# EAGLE board ControlBoard (EAGLE 9.6.2)

Size 126 x 59 mm. Coordinates in mm from the lower left corner, seen from the top.
Outline: 0,0 126,0 126,30 86,30 86,51 43,51 43,59 17,59 17,30 0,30 0,0
Copper layers (1*16): Top 0.035mm / dielectric 1.5mm / Bottom 0.035mm
Design rules "default": minimum track width 6mil, minimum drill 0.35mm, track to track 6mil, track to pad 6mil, pad to pad 6mil, via to via 6mil, smd to smd 6mil, copper to edge 40mil, drill to drill 6mil, minimum pad ring 10mil, minimum via ring 8mil, stop-mask expansion 4mil, vias tented up to drill 0mil, thermal gap 10mil

## Footprints (pad centres in the part's own frame; a part is rotated, then mirrored left to right if it is on the bottom)
B375P = drill 0.7 pad 2.159 octagon: 1 -2.54,0; 2 0,2.54; 3 2.54,0
9MM_METAL_SHAFT = drill 1.1 pad 1.93 square: P$1 2.54,0 | drill 1.1 pad 1.93: P$2 0,0; P$3 -2.54,0 | drill 1.5: P$4 -5,7; P$5 5,7
.33UF+ = drill 1 pad 2: 1 -2.54,0; 2 2.54,0
5MM = drill 1 pad 2: 1 -2.54,0; 2 2.54,0
B3B-XH = drill 1 pad 1.676 square: P$1 2.5,0 | drill 1 pad 1.676: P$2 0,0; P$3 -2.5,0
SE14 = drill 1.397 pad 2.54 octagon: MP 0,0
82114R = drill 0.813 long: 1 0,1.905; 2 0,-1.905
2X13 = drill 1.016 pad 1.88 square: 1 0,0 | drill 1.016 pad 1.88: 2 0,2.54; 3 2.54,0; 4 2.54,2.54; 5 5.08,0; 6 5.08,2.54; 7 7.62,0; 8 7.62,2.54; 9 10.16,0; 10 10.16,2.54; 11 12.7,0; 12 12.7,2.54; 13 15.24,0; 14 15.24,2.54; 15 17.78,0; 16 17.78,2.54; 17 20.32,0; 18 20.32,2.54; 19 22.86,0; 20 22.86,2.54; 21 25.4,0; 22 25.4,2.54; 23 27.94,0; 24 27.94,2.54; 25 30.48,0; 26 30.48,2.54
DIL08 = drill 1.1 pad 1.8 square: 1 -3.81,-3.81 | drill 1.1 pad 1.8: 2 -1.27,-3.81; 3 1.27,-3.81; 4 3.81,-3.81; 5 3.81,3.81; 6 1.27,3.81; 7 -1.27,3.81; 8 -3.81,3.81
7.5MM.2 = drill 1 pad 2: 1 -3.81,0; 2 3.81,0

## Placement (x,y rotation side)
BASS  10K  [B375P]  -62.23,35.29 0 top  (outside the outline)
BRIGHTNESS  50K  [9MM_METAL_SHAFT]  96,5 0 top
C1  10nF  [.33UF+]  -63.5,60.69 0 top  (outside the outline)
C2  100nF  [5MM]  -52.07,65.77 0 top  (outside the outline)
C3  18nF  [.33UF+]  -17.78,67.04 0 top  (outside the outline)
C4  220nF  [.33UF+]  -26.67,67.04 0 top  (outside the outline)
C5  100nF  [5MM]  -59.69,65.77 0 top  (outside the outline)
C6  *pF  [.33UF+]  -35.56,67.04 0 top  (outside the outline)
C7  *pF  [.33UF+]  -44.45,67.04 0 top  (outside the outline)
FEEDBACK  10K  [9MM_METAL_SHAFT]  30,5 0 top
GAIN  100K  [9MM_METAL_SHAFT]  74,5 0 top
HEAD_LONG  03-JST-B3B-XH-A  [B3B-XH]  -58.42,20.05 0 top  (outside the outline)
HEAD_OUT  03-JST-B3B-XH-A  [B3B-XH]  -21.59,34.02 0 top  (outside the outline)
HEAD_SHORT  03-JST-B3B-XH-A  [B3B-XH]  -38.1,34.02 0 top  (outside the outline)
HIN_1  SE14  [SE14]  -25.4,60.69 0 top  (outside the outline)
HIN_2  SE14  [SE14]  -31.75,60.69 0 top  (outside the outline)
HIN_3  SE14  [SE14]  -38.1,60.69 0 top  (outside the outline)
HIN_4  SE14  [SE14]  -44.45,60.69 0 top  (outside the outline)
HIN_5  SE14  [SE14]  -50.8,60.69 0 top  (outside the outline)
HIN_6  SE14  [SE14]  -57.15,60.69 0 top  (outside the outline)
HOUT_1  SE14  [SE14]  -59.69,53.07 0 top  (outside the outline)
HOUT_2  SE14  [SE14]  -68.58,53.07 0 top  (outside the outline)
HOUT_3  SE14  [SE14]  -19.05,60.69 0 top  (outside the outline)
INDUCTOR  82114R  [82114R]  -45.72,21.32 0 top  (outside the outline)
JANK  10K  [9MM_METAL_SHAFT]  52,5 0 top
MAINBOARD  [2X13]  -48.26,53.07 0 top  (outside the outline)
MIX  100K  [9MM_METAL_SHAFT]  118,5 0 top
OPAMP1  TL072P  [DIL08]  -27.94,45.45 0 top  (outside the outline)
OPAMP2  TL072P  [DIL08]  -39.37,45.45 0 top  (outside the outline)
POSTGAIN  [B375P]  -52.07,35.29 0 top  (outside the outline)
R4  1k6  [7.5MM.2]  -17.78,70.85 0 top  (outside the outline)
R5  1K  [7.5MM.2]  -27.94,70.85 0 top  (outside the outline)
R6  1M  [7.5MM.2]  -38.1,70.85 0 top  (outside the outline)
R7  2K2  [7.5MM.2]  -48.26,70.85 0 top  (outside the outline)
R8  2K2  [7.5MM.2]  -58.42,70.85 0 top  (outside the outline)
R9  2K2  [7.5MM.2]  -17.78,73.39 0 top  (outside the outline)
R10  1K  [7.5MM.2]  -27.94,73.39 0 top  (outside the outline)
R11  1K  [7.5MM.2]  -38.1,73.39 0 top  (outside the outline)
R12  100K  [7.5MM.2]  -48.26,73.39 0 top  (outside the outline)
R13  2K2  [7.5MM.2]  -58.42,73.39 0 top  (outside the outline)
R14  10K  [7.5MM.2]  -17.78,75.93 0 top  (outside the outline)
R15  10K  [7.5MM.2]  -27.94,75.93 0 top  (outside the outline)
R16  100K  [7.5MM.2]  -38.1,75.93 0 top  (outside the outline)
R17  1M  [7.5MM.2]  -48.26,75.93 0 top  (outside the outline)
TIME  5K  [9MM_METAL_SHAFT]  8,5 0 top
TREBLE  10K  [B375P]  -17.78,45.45 0 top  (outside the outline)

## Library data of the parts
BASS POSTGAIN TREBLE = gm-pots
BRIGHTNESS FEEDBACK GAIN JANK MIX TIME = potentiometers
C1-C7 = capacitors-film
HEAD_LONG HEAD_OUT HEAD_SHORT = bt_con-jst-xh
HIN_1-HIN_6 HOUT_1-HOUT_3 = solpad
INDUCTOR = inductors; SPICEPREFIX: L
MAINBOARD = SparkFun-Connectors
OPAMP1 OPAMP2 = AdamsStuff
R4-R17 = resistors

## Nets
+12V: C2.1 C5.1 MAINBOARD.26 OPAMP1.8 OPAMP2.8
BIAS: C6.1 C7.1 INDUCTOR.2 R5.2
BRIGHTNESS2: OPAMP2.1 OPAMP2.2 R14.2
BROKEN2: JANK.P$2 MAINBOARD.1
DRY: MAINBOARD.7 MAINBOARD.8 MIX.P$1
GAIN1AND2: GAIN.P$2 GAIN.P$3 MAINBOARD.15 MAINBOARD.16
GAIN3: MAINBOARD.17 MAINBOARD.18 OPAMP2.3 R4.2
GND: BRIGHTNESS.P$4 BRIGHTNESS.P$5 C1.2 C2.2 C5.2 FEEDBACK.P$4 FEEDBACK.P$5 GAIN.P$4 GAIN.P$5 JANK.P$4 JANK.P$5 MAINBOARD.11 MAINBOARD.12 MAINBOARD.13 MAINBOARD.14 MIX.P$4 MIX.P$5 OPAMP1.4 OPAMP2.4 TIME.P$4 TIME.P$5
INPUTRETURN: MAINBOARD.19 MAINBOARD.20 OPAMP1.1 R8.1 R11.2
LED: MAINBOARD.21
LEVEL2: MAINBOARD.23 MIX.P$2
N$1: BRIGHTNESS.P$2 C1.1 OPAMP2.5 R6.1
N$2: HEAD_LONG.P$3 HIN_4.MP
N$3: BASS.2 R9.2
N$4: R10.1 TREBLE.3
N$5: C3.2 TREBLE.2
N$6: HEAD_LONG.P$2 HIN_5.MP
N$7: HEAD_LONG.P$1 HIN_6.MP
N$8: HEAD_OUT.P$3 HOUT_1.MP
N$9: BRIGHTNESS.P$3 R5.1
N$10: HEAD_OUT.P$2 HOUT_2.MP
N$11: HEAD_OUT.P$1 HOUT_3.MP
N$12: OPAMP2.6 POSTGAIN.2
N$13: MIX.P$3 OPAMP2.7 POSTGAIN.1
N$14: HEAD_SHORT.P$3 HIN_1.MP
N$15: BASS.3 C4.2 R7.1
N$16: BASS.1 C4.1 R8.2
N$17: R11.1 TREBLE.1
N$20: FEEDBACK.P$2 R13.2 R17.2
N$21: C3.1 OPAMP1.2 R9.1
N$23: OPAMP1.3 R12.1
N$24: OPAMP1.6 R13.1 R14.1 R15.2
N$25: OPAMP1.5 R16.1
N$26: HEAD_SHORT.P$2 HIN_2.MP
N$27: HEAD_SHORT.P$1 HIN_3.MP
N$28: GAIN.P$1 R4.1
REPEATS: FEEDBACK.P$3 MAINBOARD.9 MAINBOARD.10
TIME1ANDJANK1: JANK.P$3 MAINBOARD.2 TIME.P$3
TIME2: MAINBOARD.3 MAINBOARD.4 TIME.P$2
TOBAXANDALL: OPAMP1.7 R7.2 R10.2 R15.1
VC: JANK.P$1 MAINBOARD.5 MAINBOARD.6 TIME.P$1
VREF: FEEDBACK.P$1 MAINBOARD.24 POSTGAIN.3 R6.2 R12.2 R16.2 R17.1
WET: C6.2 C7.2 INDUCTOR.1 MAINBOARD.25

## Tracks (layer width: path | path; a pad name or v marks a point on that pad's centre or on a via)
+12V  (4 unrouted)
BIAS  (3 unrouted)
BRIGHTNESS2  (2 unrouted)
BROKEN2  (1 unrouted)
DRY  (2 unrouted)
GAIN1AND2  (3 unrouted)
GAIN3  (3 unrouted)
GND  (20 unrouted)
INPUTRETURN  (4 unrouted)
LEVEL2  (1 unrouted)
N$1  (3 unrouted)
N$2  (1 unrouted)
N$3  (1 unrouted)
N$4  (1 unrouted)
N$5  (1 unrouted)
N$6  (1 unrouted)
N$7  (1 unrouted)
N$8  (1 unrouted)
N$9  (1 unrouted)
N$10  (1 unrouted)
N$11  (1 unrouted)
N$12  (1 unrouted)
N$13  (2 unrouted)
N$14  (1 unrouted)
N$15  (2 unrouted)
N$16  (2 unrouted)
N$17  (1 unrouted)
N$20  (2 unrouted)
N$21  (2 unrouted)
N$23  (1 unrouted)
N$24  (3 unrouted)
N$25  (1 unrouted)
N$26  (1 unrouted)
N$27  (1 unrouted)
N$28  (1 unrouted)
REPEATS  (2 unrouted)
TIME1ANDJANK1  (2 unrouted)
TIME2  (2 unrouted)
TOBAXANDALL  (3 unrouted)
VC  (3 unrouted)
VREF  (6 unrouted)
WET  (3 unrouted)